# Altium PCB PCB1.PcbDoc
Units mil, origin at the board's own origin, x right, y up, seen from the top; angles counter-clockwise.
Board outline 1981.14 x 2390.95 mil, 2 copper layers (Top Layer, Bottom Layer), stack 61.756 mil thick; 46 components, 41 nets, 193 pads, 397 vias.
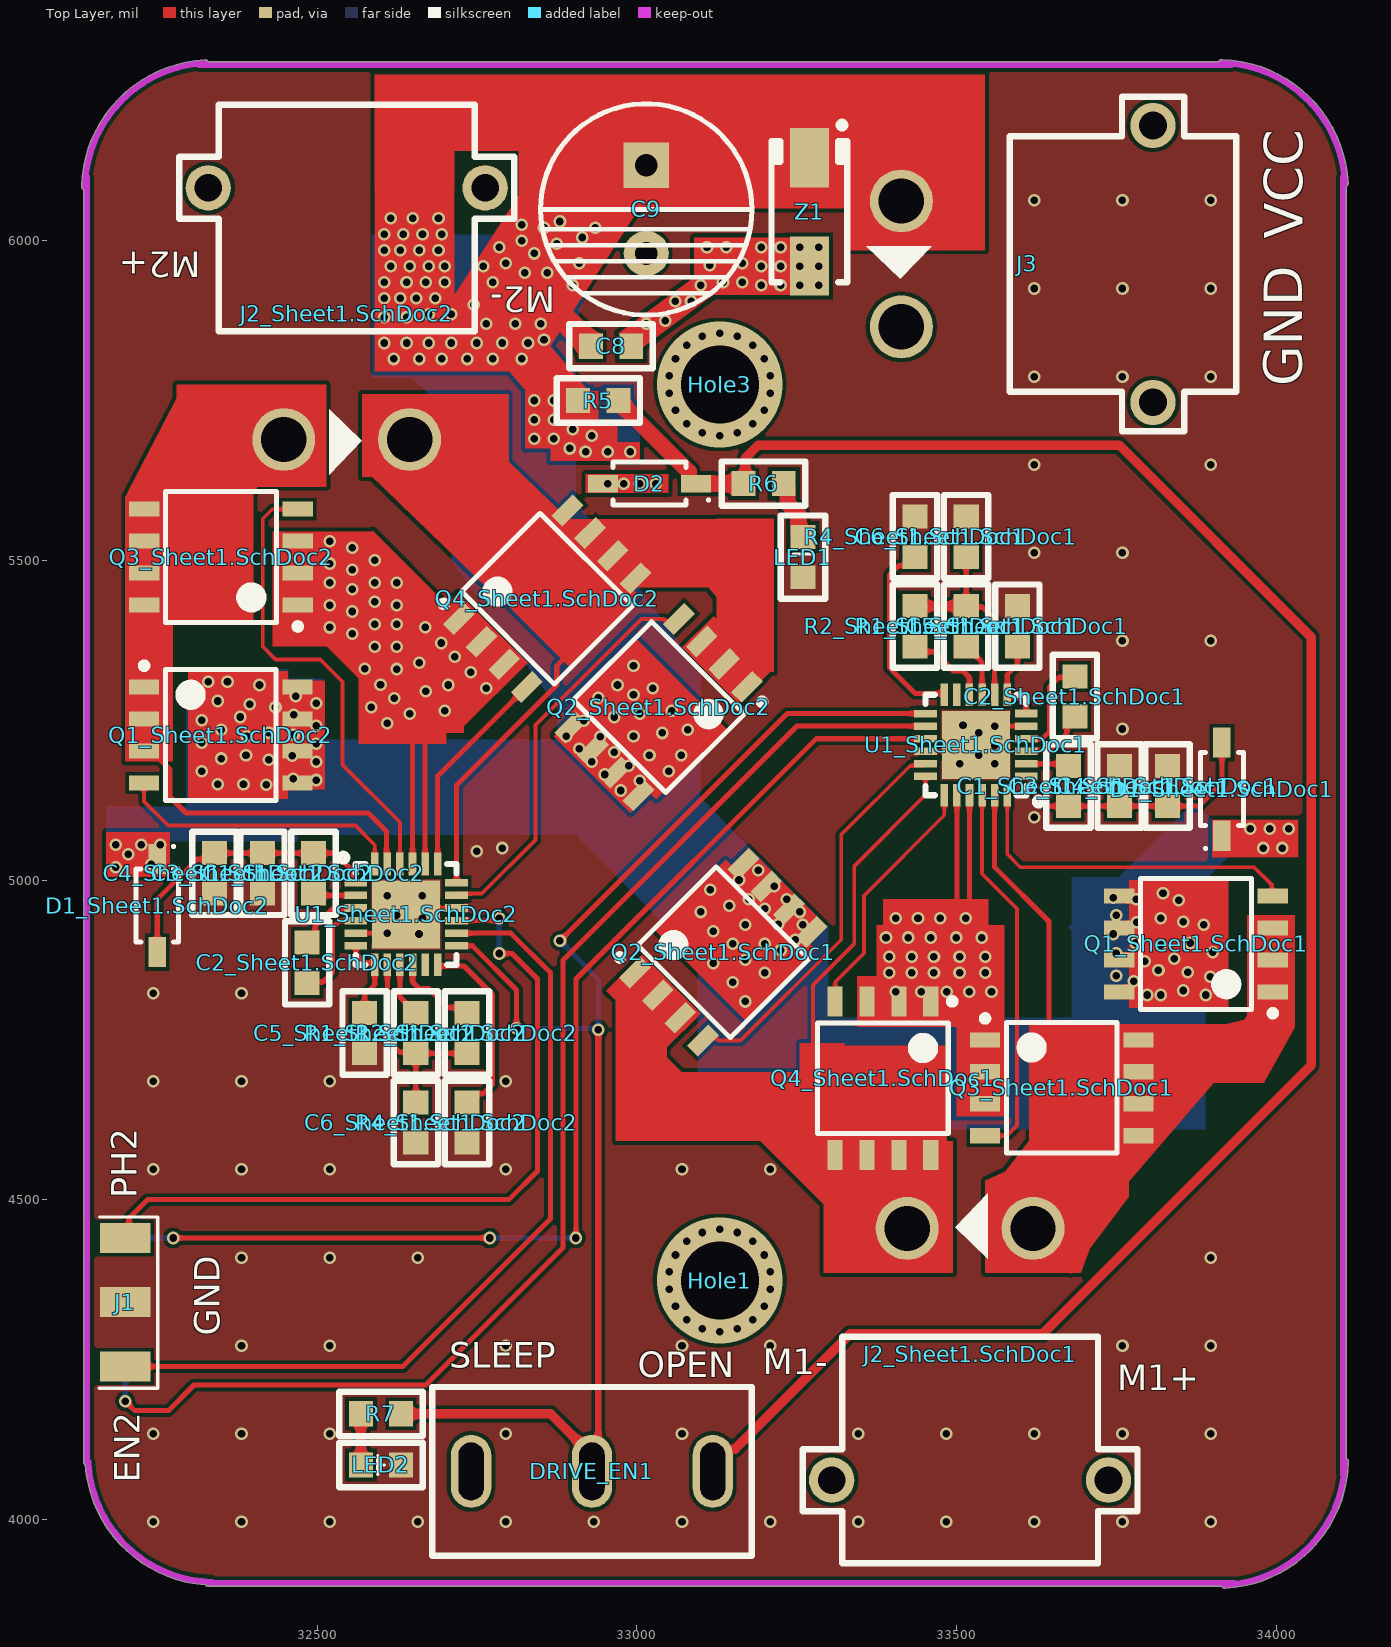
[diagram p0: Top Layer view]
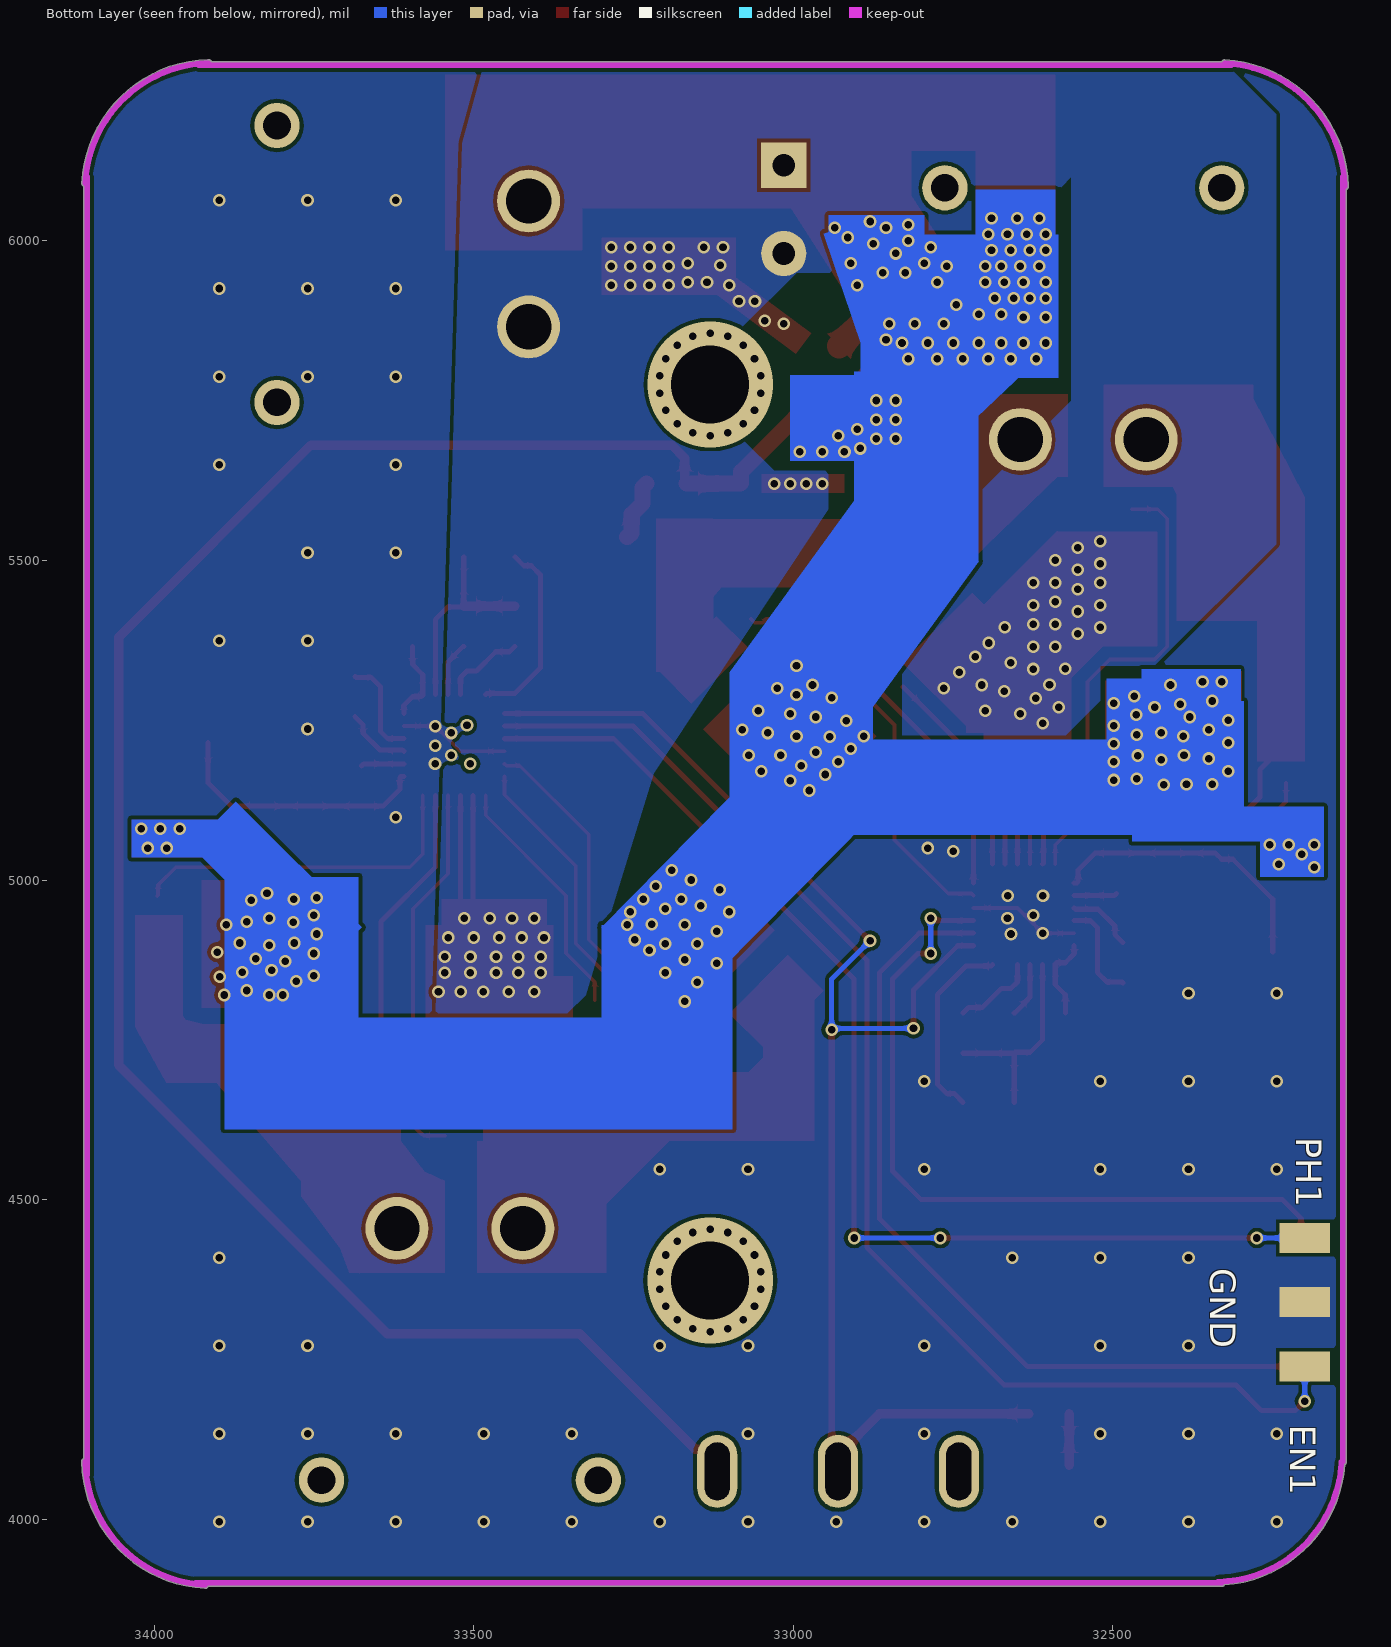
[diagram p1: Bottom Layer view, seen from below]
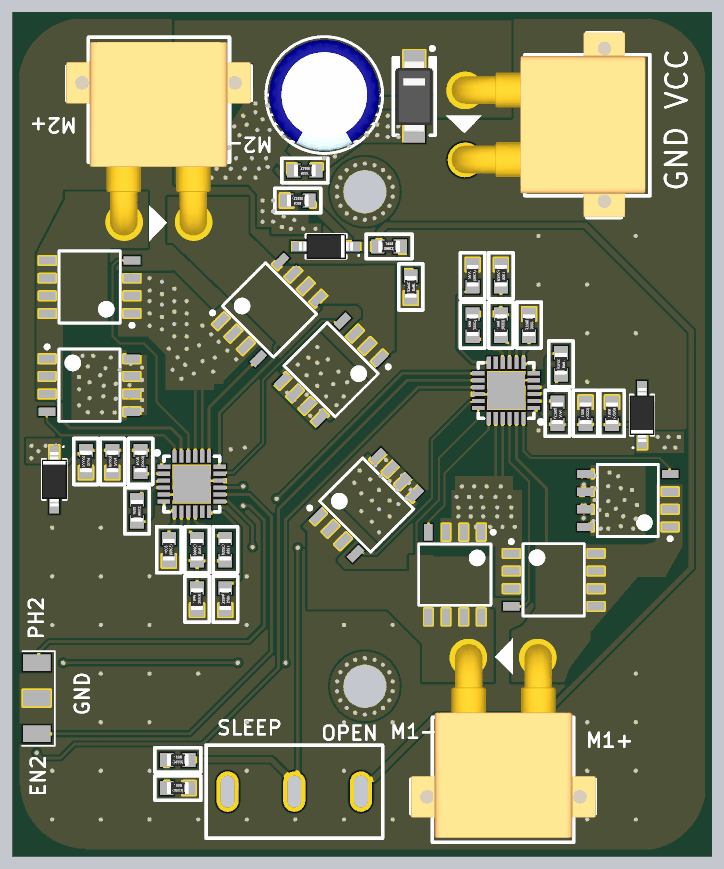
[diagram p2: 3D render of the assembled board from above, using the file's embedded part models]

## Layer stack, top to bottom
Top Solder: solder mask 1, SM-001, Dk 4
Top Layer: signal copper 1.378
Dielectric 1: core 59, Core-043, Dk 4.3
Bottom Layer: signal copper 1.378
Bottom Solder: solder mask 1, SM-001, Dk 4

## Board outline
32137.37,4085.73 ccw(c32340,4100) 32325.73,3897.37 ccw(c32330,3900) 32330,3894.99 33915.36,3894.99 ccw(c33919.89,3897.13) 33920.14,3892.12 ccw(c33910,4095) 34113.07,4089.92 ccw(c34108.05,4090.05) 34113.07,4090.05 ccw(c34108.05,4090.05) 34110.01,4094.66 34110.01,6085.36 ccw(c34107.87,6089.89) 34112.88,6089.89 ccw(c34107.87,6089.89) 34112.88,6090.14 ccw(c33910,6080) 33915.08,6283.07 ccw(c33914.95,6278.05) 33910.34,6280.02 32329.64,6280.02 ccw(c32325.11,6277.87) 32324.86,6282.88 ccw(c32335,6080) 32131.93,6085.08 ccw(c32136.95,6084.95) 32134.99,6080.34 32134.99,4090 ccw(c32140,4090)

## Design rules (kind name [scope] priority, off if disabled: settings)
Clearance [All] p1: gap=6 ignorepadtopadclearanceinfootprint=TRUE except(0: Arc-Hole Track-Hole SMDPad-Hole THPad-Hole Via-Hole Fill-Hole Poly-Hole Region-Hole Text-Hole)
DiffPairsRouting [All] p1: maxlimit=10 minlimit=6 mostfreqgap=10 toplayer_minwidth=6 toplayer_maxwidth=99 toplayer_prefwidth=15 bottomlayer_minwidth=6 bottomlayer_maxwidth=99 bottomlayer_prefwidth=15 maxuncoupledlength=500
HoleToHoleClearance [All] p1: gap=6 allowstackedmicrovias=TRUE
MinimumSolderMaskSliver [All] p1: minsoldermaskwidth=6
PlaneConnect [All] p1: planeconnectstyle=Direct reliefexpansion=20 reliefentries=4 reliefconductorwidth=10 reliefairgap=10
PolygonConnect [All] p1: connectstyle=Direct reliefconductorwidth=30 reliefentries=4 polygonreliefangle="90 Angle" airgapwidth=10
RoutingVias [All] p1: holewidth=11.81 width=19.68 viastyle="Through Hole" minholewidth=11.81 minwidth=19.68 maxholewidth=3897.64 maxwidth=3897.64
SilkToSilkClearance [All] p1: silktosilkclearance=0
SilkToSolderMaskClearance [IsPad] p1: minsilkscreentomaskgap=6 clearancetoexposedcopper=TRUE
SolderMaskExpansion [All] p1: expansion=4 istentingtop=FALSE
Width [All] p1: maxlimit=99 minlimit=6 preferedwidth=10
24 further rules are at their usual default settings.

## Classes and differential pairs
component class Sheet1.SchDoc2: C1_Sheet1.SchDoc2 C2_Sheet1.SchDoc2 C3_Sheet1.SchDoc2 C4_Sheet1.SchDoc2 C5_Sheet1.SchDoc2 C6_Sheet1.SchDoc2 D1_Sheet1.SchDoc2 J2_Sheet1.SchDoc2 Q1_Sheet1.SchDoc2 Q2_Sheet1.SchDoc2 Q3_Sheet1.SchDoc2 Q4_Sheet1.SchDoc2 R1_Sheet1.SchDoc2 R2_Sheet1.SchDoc2 R4_Sheet1.SchDoc2 U1_Sheet1.SchDoc2
component class Sheet1.SchDoc1: C1_Sheet1.SchDoc1 C2_Sheet1.SchDoc1 C3_Sheet1.SchDoc1 C4_Sheet1.SchDoc1 C5_Sheet1.SchDoc1 C6_Sheet1.SchDoc1 D1_Sheet1.SchDoc1 J2_Sheet1.SchDoc1 Q1_Sheet1.SchDoc1 Q2_Sheet1.SchDoc1 Q3_Sheet1.SchDoc1 Q4_Sheet1.SchDoc1 R1_Sheet1.SchDoc1 R2_Sheet1.SchDoc1 R4_Sheet1.SchDoc1 U1_Sheet1.SchDoc1
channel class Sheet1: Sheet11 Sheet12
component class Sheet2: C8 C9 D2 DRIVE_EN1 Hole1 Hole3 J1 J3 LED1 LED2 R5 R6 R7 Z1

## Components (designator, comment, footprint, x,y, rotation, side; value= is the part's Value field where it differs from the comment)
C1_Sheet1.SchDoc1 "1UF" 0603 33675.42,5147.01 r270 top (schematic designator C1)
C1_Sheet1.SchDoc2 "1UF" 0603 32494.5,5010.5 r90 top (schematic designator C1)
C2_Sheet1.SchDoc1 "0.1UF" 0603 33685.42,5287.01 r270 top (schematic designator C2)
C2_Sheet1.SchDoc2 "0.1UF" 0603 32484.5,4870.5 r90 top (schematic designator C2)
C3_Sheet1.SchDoc1 "10UF" 0603 33755.42,5147.01 r90 top (schematic designator C3)
C3_Sheet1.SchDoc2 "10UF" 0603 32414.5,5010.5 r270 top (schematic designator C3)
C4_Sheet1.SchDoc1 "0.1UF" 0603 33830.42,5147.01 r90 top (schematic designator C4)
C4_Sheet1.SchDoc2 "0.1UF" 0603 32339.5,5010.5 r270 top (schematic designator C4)
C5_Sheet1.SchDoc1 "1UF" 0603 33595.42,5397.01 r270 top (schematic designator C5)
C5_Sheet1.SchDoc2 "1UF" 0603 32574.5,4760.5 r90 top (schematic designator C5)
C6_Sheet1.SchDoc1 "1UF" 0603 33515.42,5537.01 r270 top (schematic designator C6)
C6_Sheet1.SchDoc2 "1UF" 0603 32654.5,4620.5 r90 top (schematic designator C6)
C8 "10UF" 0603 32960,5835 r180 top
C9 "220UF" DIP-EC3.5X8X11.5 33015,6117.8 r270 top
D1_Sheet1.SchDoc1 "1N5819" SOD-123 33915.42,5142.01 r90 top (schematic designator D1)
D1_Sheet1.SchDoc2 "1N5819" SOD-123 32250,4960 r270 top (schematic designator D1)
D2 "BZT52C3V3" SOD-123 33020,5620 r180 top
DRIVE_EN1 "SW-SPDT" ss12d10 32928.47,4072.95 r180 top
Hole1 "3mmVias" 3mm 33130,4373.43 r90 top
Hole3 "3mmVias" 3mm 33130,5775 r90 top
J1 "HDR2x3" pin_2*3 32203,4283 r90 top
J2_Sheet1.SchDoc1 "HDR1x2" TX30_接口 33528,4229 r180 top (schematic designator J2)
J2_Sheet1.SchDoc2 "HDR1x2" TX30_接口 32540,5915 r0 top (schematic designator J2)
J3 "HDR1x2" TX30_接口 33640,5970 r270 top
LED1 "LED0" 0603-led 33260,5505 r270 top
LED2 "LED0" 0603-led 32600,4085 r0 top
Q1_Sheet1.SchDoc1 "TPH1R403NL" TPH1R403NL#1 33874.92,4900 r180 top (schematic designator Q1)
Q1_Sheet1.SchDoc2 "TPH1R403NL" TPH1R403NL#2 32349.5,5226.69 r0 top (schematic designator Q1)
Q2_Sheet1.SchDoc1 "TPH1R403NL" TPH1R403NL#1 33135.42,4887.01 r45 top (schematic designator Q2)
Q2_Sheet1.SchDoc2 "TPH1R403NL" TPH1R403NL#3 33034.5,5270.5 r225 top (schematic designator Q2)
Q3_Sheet1.SchDoc1 "TPH1R403NL" TPH1R403NL#1 33665,4675 r0 top (schematic designator Q3)
Q3_Sheet1.SchDoc2 "TPH1R403NL" TPH1R403NL#3 32349.92,5505 r180 top (schematic designator Q3)
Q4_Sheet1.SchDoc1 "TPH1R403NL" TPH1R403NL#1 33385,4690 r270 top (schematic designator Q4)
Q4_Sheet1.SchDoc2 "TPH1R403NL" TPH1R403NL#3 32860,5440 r45 top (schematic designator Q4)
R1_Sheet1.SchDoc1 "10K" 0603 33515.42,5397.01 r90 top (schematic designator R1)
R1_Sheet1.SchDoc2 "10K" 0603 32654.5,4760.5 r270 top (schematic designator R1)
R2_Sheet1.SchDoc1 "10K" 0603 33435.42,5397.01 r90 top (schematic designator R2)
R2_Sheet1.SchDoc2 "10K" 0603 32734.5,4760.5 r270 top (schematic designator R2)
R4_Sheet1.SchDoc1 "200K" 0603 33435.42,5537.01 r90 top (schematic designator R4)
R4_Sheet1.SchDoc2 "200K" 0603 32734.5,4620.5 r270 top (schematic designator R4)
R5 "2.2K" 0603 32940,5750 r180 top
R6 "1K" 0603 33198.5,5620 r0 top
R7 "2K" 0603 32600,4165 r0 top
U1_Sheet1.SchDoc1 "Drv8701e" DRV8701E 33530.47,5212.23 r90 top (schematic designator U1)
U1_Sheet1.SchDoc2 "Drv8701e" DRV8701E 32639.44,4945.28 r270 top (schematic designator U1)
Z1 "Diode" SMA 33270,6045 r90 top

## Footprints (in the part's own frame and the unit in brackets; to place one, negate y for a bottom-side part, rotate by r counter-clockwise, add the part's x,y. Pads: shape width x height; smd on the part's side, far side on the other; paste and mask are expansions set on the pad)
3mm [mil]
0603 [mm] "SMD, 0603"
  rect 0.95x1 smd: 1(-0.8,0) 2(0.8,0)
  silkscreen extent -1.66,-0.88 1.66,0.88, body extent -0.77,-0.43 0.77,0.43, height 0.45
0603-led [mm] "SMD, 0603"
  rect 0.95x1 smd: 1(-0.8,0) 2(0.8,0)
  silkscreen extent -1.66,-0.88 1.66,0.88, body extent -0.77,-0.43 0.77,0.43, height 0.45
DIP-EC3.5X8X11.5 [mm]
  rect 1.8x1.8 hole 0.9: 1(0,0)
  round 1.8 hole 0.9: 2(3.5,0)
  silkscreen extent -2.45,-4.2 5.95,4.2, body extent -2.25,-4 5.75,4, height 11.53
DRV8701E [mm]
  rect 0.3x0.9 smd: 1(-1.277,-1.998) 2(-0.777,-1.998) 3(-0.277,-1.998) 4(0.224,-1.998) 5(0.724,-1.998) 6(1.224,-1.998) 13(1.223,2.002) 14(0.723,2.002) 15(0.223,2.002) 16(-0.277,2.002) 17(-0.776,2.002) 18(-1.276,2.002)
  rect 0.9x0.3 smd: 7(1.974,-1.248) 8(1.974,-0.748) 9(1.974,-0.247) 10(1.974,0.253) 11(1.974,0.753) 12(1.974,1.252) 19(-2.027,1.252) 20(-2.027,0.752) 21(-2.027,0.252) 22(-2.027,-0.247) 23(-2.027,-0.747) 24(-2.027,-1.247)
  rect 2.7x2.7 smd: 25(-0.025,0)
  silkscreen extent -2.43,-2.65 1.97,2
pin_2*3 [mil]
  rect 47.24x78.74 smd: 1(-44,3) 3(57,3) 5(157,3)
  rect 47.24x78.74 smd far side: 2(-44,3) 4(57,3) 6(157,3)
  silkscreen extent -78,-48 190,44
SMA [mm] "DO-214AC"
  rect 2.35x1.55 smd: 1(-2.15,0) 2(2.15,0)
  silkscreen extent -2.8,-1.5 3.58,1.5, body extent -2.6,-1.3 2.6,1.3, height 2.64
SOD-123 [mm]
  rect 1.2x0.7 smd: 1(-1.85,0) 2(1.85,0)
  silkscreen extent -2.4,-0.85 1.45,0.85, body extent -1.95,-0.9 1.95,0.9, height 1.18
ss12d10 [mm]
  oval 1.6x2.9 hole 1 slot 2.3 at 90 deg: 1(-4.839,-0.052) 2(-0.039,-0.052) 3(4.761,-0.052)
  silkscreen extent -6.39,-3.4 6.31,3.3
TPH1R403NL#1 [mm]
  rect 1.2x0.6 smd: D(3.05,1.905) D(3.05,-1.905) D(3.05,-0.635) D(3.05,0.635) G(-3.05,-1.905) S(-3.05,1.905) S(-3.05,-0.635) S(-3.05,0.635)
  Top Layer region: 2.667,2.54 -1.295,2.54 -1.295,-2.54 2.667,-2.54
  Top Layer lines w0.254: 2.896,2.083 2.616,2.083 ; 2.896,0.813 2.489,0.813 ; 2.896,0.457 2.489,0.457 ; 2.896,-2.083 2.591,-2.083 ; 2.87,-1.727 2.591,-1.727 ; 2.845,1.727 2.616,1.727 ; 2.845,-0.483 2.413,-0.483 ; 2.845,-0.813 2.54,-0.813 ; -2.845,0.813 -2.845,0.483
  silkscreen extent -3.18,-2.6 2.2,2.88, body extent -2.6,-2.6 2.6,2.6, height 1
TPH1R403NL#2 [mm]
  rect 1.2x0.6 smd: D(3.05,-1.905) D(3.05,1.905) D(3.05,-0.635) D(3.05,0.635) G(-3.05,-1.905) S(-3.05,1.905) S(-3.05,-0.635) S(-3.05,0.635)
  Top Layer region: 2.667,2.54 -1.295,2.54 -1.295,-2.54 2.667,-2.54
  Top Layer lines w0.254: 2.413,-0.483 2.845,-0.483 ; 2.489,0.457 2.896,0.457 ; 2.489,0.813 2.896,0.813 ; 2.54,-0.813 2.845,-0.813 ; 2.591,-2.083 2.896,-2.083 ; 2.591,-1.727 2.87,-1.727 ; 2.616,1.727 2.845,1.727 ; 2.616,2.083 2.896,2.083
  silkscreen extent -3.17,-2.6 2.2,2.88, body extent -2.6,-2.6 2.6,2.6, height 1
TPH1R403NL#3 [mm]
  rect 1.2x0.6 smd: D(3.05,1.905) D(3.05,-1.905) D(3.05,0.635) D(3.05,-0.635) G(-3.05,-1.905) S(-3.05,1.905) S(-3.05,-0.635) S(-3.05,0.635)
  Top Layer region: 2.667,2.54 -1.295,2.54 -1.295,-2.54 2.667,-2.54
  Top Layer lines w0.254: 2.896,-2.083 2.591,-2.083 ; 2.87,-1.727 2.591,-1.727 ; 2.845,-0.813 2.54,-0.813 ; 2.845,-0.483 2.413,-0.483 ; 2.896,0.457 2.489,0.457 ; 2.896,0.813 2.489,0.813 ; 2.845,1.727 2.616,1.727 ; 2.896,2.083 2.616,2.083 ; -2.845,0.483 -2.845,0.635 -2.845,0.813
  silkscreen extent -3.17,-2.6 2.2,2.88, body extent -2.6,-2.6 2.6,2.6, height 1
TX30_接口 [mm]
  round 2.5 hole 1.8: 1(2.663,-5.74) 2(-2.337,-5.74)
  round 1.8 hole 1.1: SH(-5.337,4.26) SH(5.663,4.26)
  silkscreen extent -6.49,-7.13 6.81,7.57, body extent -6.52,-6.72 6.78,7.23, height 5

## Part data
C1_Sheet1.SchDoc1 C1_Sheet1.SchDoc2 C2_Sheet1.SchDoc1 C2_Sheet1.SchDoc2 C3_Sheet1.SchDoc1 C3_Sheet1.SchDoc2 C4_Sheet1.SchDoc1 C4_Sheet1.SchDoc2 C5_Sheet1.SchDoc1 C5_Sheet1.SchDoc2 C6_Sheet1.SchDoc1 C6_Sheet1.SchDoc2 C8: library part CAP, "Capacitor"
C9: library part CAP-TANTALUM, "Tantalum Capacitor"
D1_Sheet1.SchDoc1 D1_Sheet1.SchDoc2: library part 1N4148, "高速开关二极管", BOM名称=高速开关二极管, 学习资源=www.ooocke.com, 版权归属=源创客
D2: library part "Diode 18TQ045", "Schottky Rectifier", ComponentLink1Description="Manufacturer Link", ComponentLink1URL=http://www.irf.com/, ComponentLink2Description=Datasheet, ComponentLink2URL=http://www.irf.com/product-info/datasheets/data/18tq.pdf, DatasheetVersion=Dec-1997, LatestRevisionDate=17-Jul-2002, LatestRevisionNote="Re-released for DXP Platform.", Note="Terminal 2 is the TAB and is electrically connected to the cathode", PackageDescription="TO, Thru-Hole, Vertical, Heatsink Mounted; 3 In-Line Leads (1 Absent); Pitch 2.54 mm", PackageReference=TO-220AC, PackageVersion=Feb-1998, Published=8-Jun-2000, Publisher="Altium Limited"
DRIVE_EN1: "SPDT Subminiature Toggle Switch, Right Angle Mounting, Vertical Actuation", ComponentLink1Description="Manufacturer Link", ComponentLink1URL=http://www.apem.com, DatasheetVersion=05-Dec-2000, LatestRevisionDate=17-Dec-2003, LatestRevisionNote="Schematic revised, PCB Footprint replaced.", PackageDescription="Switch; 4 Leads", PackageReference=TL36WW15050, Published=24-Mar-1999, Publisher="Altium Limited"
J1 J2_Sheet1.SchDoc1 J2_Sheet1.SchDoc2 J3: "Connector"
LED1 LED2: "Typical INFRARED GaAs LED", LatestRevisionDate=08-Jul-2005, LatestRevisionNote="Mech Layer 1 removed.", PackageDescription="LED; 2 Leads", PackageReference=LED-0, Published=8-Jun-2000, Publisher="Altium Limited"
R1_Sheet1.SchDoc1 R1_Sheet1.SchDoc2 R2_Sheet1.SchDoc1 R2_Sheet1.SchDoc2 R4_Sheet1.SchDoc1 R4_Sheet1.SchDoc2 R5 R6 R7: library part RES, "Resistor"
Z1: "Zener Diode"

## Via types
v1: diameter 19.68, hole 11.81, Top Layer to Bottom Layer, tented both sides, 395 vias
v2: diameter 196.85, hole 122.05, Top Layer to Bottom Layer, tented both sides, 2 vias

## Nets (pads, with @x,y where several pads share a name; then routed paths per layer and width w, separated by ;. In a path a pad name is that pad's centre, name@x,y a point inside that pad or via, vN(x,y) a via of type N, cw(c..) or ccw(c..) an arc to the next point about the centre after c; other vN are vias at no path point)
3.3: D2.1 DRIVE_EN1.1 R5.1 R6.1 | length 3195.4
  Top Layer w15: DRIVE_EN1.1 33118.98,4087.6 33141.15,4109.77 33153.75,4109.77 33333.98,4290 33635,4290 34055,4710 34055,5380 33755,5680 33190,5680 33170,5660 33170,5622.99 R6.1
  Top Layer w25: R5.1 32971.5,5749.02 33081.71,5638.8 33081.71,5621.28 33082.99,5620 D2.1 R6.1
EN1: J1.2 U1_Sheet1.SchDoc1.14 | length 2019
  Top Layer w8: v1(32200,4185) 32215,4170 32267.5,4170 32307.5,4210 32670,4210 32885,4425 32885,4875 33250.68,5240.68 U1_Sheet1.SchDoc1.14
  Bottom Layer w8: v1(32200,4185) J1.2
EN2: J1.1 U1_Sheet1.SchDoc2.14 | length 1318.1
  Top Layer w8: J1.1 32634,4239 32865,4470 32865,4855 32803.17,4916.83 U1_Sheet1.SchDoc2.14
GND: C3_Sheet1.SchDoc1.2 C3_Sheet1.SchDoc2.2 C4_Sheet1.SchDoc1.2 C4_Sheet1.SchDoc2.2 C5_Sheet1.SchDoc1.1 C5_Sheet1.SchDoc2.1 C6_Sheet1.SchDoc1.1 C6_Sheet1.SchDoc2.1 J1.3 J1.4 LED1.2 LED2.2 R4_Sheet1.SchDoc1.2 R4_Sheet1.SchDoc2.2 U1_Sheet1.SchDoc1.5 U1_Sheet1.SchDoc1.16 U1_Sheet1.SchDoc1.25 U1_Sheet1.SchDoc2.5 U1_Sheet1.SchDoc2.16 U1_Sheet1.SchDoc2.25 | length 347.6
  Top Layer w6: U1_Sheet1.SchDoc2.5 v1(32609.94,4916.78) U1_Sheet1.SchDoc2.25 32649.34,4956.18 U1_Sheet1.SchDoc2.16 ; U1_Sheet1.SchDoc1.16 33520.57,5201.33 v1(33559.97,5240.73) U1_Sheet1.SchDoc1.5
  other v1: 32244.1,3996.06 32381.9,3996.06 32519.69,3996.06 32657.49,3996.06 32795.28,3996.06 32933.08,3996.06 33070.87,3996.06 33208.67,3996.06 33346.46,3996.06 33484.26,3996.06 33622.05,3996.06 33759.85,3996.06 33897.64,3996.06 32244.1,4133.86 32381.9,4133.86 32519.69,4133.86 32795.28,4133.86 33070.87,4133.86 33346.46,4133.86 33484.26,4133.86 33622.05,4133.86 33759.85,4133.86 33897.64,4133.86 32381.9,4271.65 32519.69,4271.65 32795.28,4271.65 33070.87,4271.65 33208.67,4271.65 33759.85,4271.65 33897.64,4271.65 32381.9,4409.45 32519.69,4409.45 32657.49,4409.45 33897.64,4409.45 32244.1,4547.24 32381.9,4547.24 32519.69,4547.24 32795.28,4547.24 33070.87,4547.24 33208.67,4547.24 32244.1,4685.04 32381.9,4685.04 32519.69,4685.04 32795.28,4685.04 32244.1,4822.84 32381.9,4822.84 32659.5,4915.5 32665,4940 32625,4945 32609.5,4975.5 32664.5,4975.5 32750,5045 32790,5050 33622.05,5098.43 33505.42,5182.01 33560.42,5182.01 33535,5195 33560,5210 33535,5230 33759.85,5236.22 33510.42,5242.01 33759.85,5374.02 33897.64,5374.02 33622.05,5511.81 33759.85,5511.81 33622.05,5649.61 33897.64,5649.61 33622.05,5787.4 33759.85,5787.4 33897.64,5787.4 33622.05,5925.2 33759.85,5925.2 33897.64,5925.2 33622.05,6062.99 33759.85,6062.99 33897.64,6062.99
M+_Sheet1.SchDoc1: J2_Sheet1.SchDoc1.2 Q1_Sheet1.SchDoc1.S Q3_Sheet1.SchDoc1.D U1_Sheet1.SchDoc1.23 | length 427.7
  Top Layer w6: 33645,4772.03 33662.03,4755 33670,4755
  Top Layer w8: U1_Sheet1.SchDoc1.23 33559.89,5020.11 33645,4935 33645,4772.03
M+_Sheet1.SchDoc2: J2_Sheet1.SchDoc2.2 Q1_Sheet1.SchDoc2.S Q3_Sheet1.SchDoc2.D U1_Sheet1.SchDoc2.23 | length 521.1
  Top Layer w8: Q1_Sheet1.SchDoc2.S@32229.42,5201.69 32241.23,5201.69 32249.04,5193.87 32270,5172.92 32270,5130 32295,5105 32580,5105 32608.59,5076.42 32608.59,5026.52 U1_Sheet1.SchDoc2.23
  Top Layer w10: 32237.42,5285.69 Q1_Sheet1.SchDoc2.S@32237.42,5298.69
M-_Sheet1.SchDoc1: J2_Sheet1.SchDoc1.1 Q2_Sheet1.SchDoc1.S Q4_Sheet1.SchDoc1.D U1_Sheet1.SchDoc1.18 | length 588.8
  Top Layer w6: 33260,4655 33262.4,4655 33276,4668.6 33276,4836 33340.42,4900.42 33340.42,5022.01 33451.67,5133.27 U1_Sheet1.SchDoc1.18
  Top Layer w25: Q2_Sheet1.SchDoc1.S@33068.19,4783.45 Q2_Sheet1.SchDoc1.S@33068.19,4784.43
M-_Sheet1.SchDoc2: J2_Sheet1.SchDoc2.1 Q2_Sheet1.SchDoc2.S Q4_Sheet1.SchDoc2.D U1_Sheet1.SchDoc2.18 | length 426.6
  Top Layer w8: U1_Sheet1.SchDoc2.18 32718.24,5148.24 32875,5305 32875,5335 32890,5350
  Top Layer w25: Q2_Sheet1.SchDoc2.S@33101.73,5373.09 Q2_Sheet1.SchDoc2.S@33101.73,5374.06
NetC1_Sheet1.SchDoc1_1: C1_Sheet1.SchDoc1.1 U1_Sheet1.SchDoc1.2 | length 67.6
  Top Layer w8: U1_Sheet1.SchDoc1.2 33672.29,5181.64 C1_Sheet1.SchDoc1.1
NetC1_Sheet1.SchDoc1_2: C1_Sheet1.SchDoc1.2 C3_Sheet1.SchDoc1.1 C4_Sheet1.SchDoc1.1 D1_Sheet1.SchDoc1.2 U1_Sheet1.SchDoc1.1 | length 414.1
  Top Layer w8: U1_Sheet1.SchDoc1.1 33613.51,5161.97 33615.42,5160.07 33615.42,5142.01 33641.92,5115.52 C1_Sheet1.SchDoc1.2 C3_Sheet1.SchDoc1.1 C4_Sheet1.SchDoc1.1 33878.92,5115.52 33915.42,5152.01 D1_Sheet1.SchDoc1.2
NetC1_Sheet1.SchDoc2_1: C1_Sheet1.SchDoc2.1 U1_Sheet1.SchDoc2.2 | length 67.6
  Top Layer w8: C1_Sheet1.SchDoc2.1 32497.63,4975.87 U1_Sheet1.SchDoc2.2
NetC1_Sheet1.SchDoc2_2: C1_Sheet1.SchDoc2.2 C3_Sheet1.SchDoc2.1 C4_Sheet1.SchDoc2.1 D1_Sheet1.SchDoc2.2 U1_Sheet1.SchDoc2.1 | length 453.3
  Top Layer w8: D1_Sheet1.SchDoc2.2 32250,4970 32312.5,5032.5 32330,5032.5 C4_Sheet1.SchDoc2.1 C3_Sheet1.SchDoc2.1 C1_Sheet1.SchDoc2.2 32528,5042 32554.5,5015.5 32554.5,4997.45 32556.4,4995.54 U1_Sheet1.SchDoc2.1
NetC2_Sheet1.SchDoc1_1: C2_Sheet1.SchDoc1.1 U1_Sheet1.SchDoc1.4 | length 157.6
  Top Layer w8: U1_Sheet1.SchDoc1.4 33634.45,5221.04 33645.42,5232.01 33645.42,5302.01 33660.42,5317.01 33683.92,5317.01 C2_Sheet1.SchDoc1.1
NetC2_Sheet1.SchDoc1_2: C2_Sheet1.SchDoc1.2 U1_Sheet1.SchDoc1.3 | length 106.6
  Top Layer w8: U1_Sheet1.SchDoc1.3 33611.06,5203.23 33646.64,5203.23 33672.91,5229.5 33672.91,5243.01 C2_Sheet1.SchDoc1.2
NetC2_Sheet1.SchDoc2_1: C2_Sheet1.SchDoc2.1 U1_Sheet1.SchDoc2.4 | length 157.6
  Top Layer w8: C2_Sheet1.SchDoc2.1 32485.99,4840.5 32509.5,4840.5 32524.5,4855.5 32524.5,4925.5 32535.47,4936.47 U1_Sheet1.SchDoc2.4
NetC2_Sheet1.SchDoc2_2: C2_Sheet1.SchDoc2.2 U1_Sheet1.SchDoc2.3 | length 106.6
  Top Layer w8: C2_Sheet1.SchDoc2.2 32497.01,4914.51 32497.01,4928.01 32523.28,4954.29 32558.86,4954.29 U1_Sheet1.SchDoc2.3
NetC5_Sheet1.SchDoc1_2: C5_Sheet1.SchDoc1.2 U1_Sheet1.SchDoc1.6 U1_Sheet1.SchDoc1.7 | length 132
  Top Layer w8: C5_Sheet1.SchDoc1.2 33595.42,5337.01 33579.61,5321.21 U1_Sheet1.SchDoc1.7 33579.61,5288.92 33581.52,5287.01 33595.42,5287.01 33609.15,5273.28 U1_Sheet1.SchDoc1.6
NetC5_Sheet1.SchDoc2_2: C5_Sheet1.SchDoc2.2 U1_Sheet1.SchDoc2.6 U1_Sheet1.SchDoc2.7 | length 132
  Top Layer w8: U1_Sheet1.SchDoc2.6 32560.76,4884.24 32574.5,4870.5 32588.4,4870.5 32590.3,4868.6 U1_Sheet1.SchDoc2.7 32590.3,4836.31 32574.5,4820.5 C5_Sheet1.SchDoc2.2
NetC6_Sheet1.SchDoc1_2: C6_Sheet1.SchDoc1.2 R1_Sheet1.SchDoc1.2 R2_Sheet1.SchDoc1.2 U1_Sheet1.SchDoc1.8 | length 327.8
  Top Layer w8: C6_Sheet1.SchDoc1.2 R1_Sheet1.SchDoc1.2 33516.92,5427.01 33540.42,5427.01 33559.92,5407.51 U1_Sheet1.SchDoc1.8
  Top Layer w15: R2_Sheet1.SchDoc1.2 R1_Sheet1.SchDoc1.2
NetC6_Sheet1.SchDoc2_2: C6_Sheet1.SchDoc2.2 R1_Sheet1.SchDoc2.2 R2_Sheet1.SchDoc2.2 U1_Sheet1.SchDoc2.8 | length 327.8
  Top Layer w8: U1_Sheet1.SchDoc2.8 32609.99,4750.01 32629.5,4730.5 32653,4730.5 R1_Sheet1.SchDoc2.2 ; C6_Sheet1.SchDoc2.2 R1_Sheet1.SchDoc2.2 ; R2_Sheet1.SchDoc2.2 R1_Sheet1.SchDoc2.2
NetLED1_1: LED1.1 R6.2 | length 96.5
  Top Layer w25: R6.2 33236.2,5613.8 33236.2,5588.8 33252.81,5572.19 33252.81,5542.7 33259.02,5536.5 LED1.1
NetLED2_1: LED2.1 R7.1 | length 80
  Top Layer w15: LED2.1 R7.1
NetQ1_Sheet1.SchDoc1_G: Q1_Sheet1.SchDoc1.G U1_Sheet1.SchDoc1.24 | length 543.8
  Top Layer w6: U1_Sheet1.SchDoc1.24 33579.58,5040.42 33600,5020 33965.84,5020 33993.55,4992.3 33993.55,4976.45 Q1_Sheet1.SchDoc1.G
NetQ1_Sheet1.SchDoc2_G: Q1_Sheet1.SchDoc2.G U1_Sheet1.SchDoc2.24 | length 447.5
  Top Layer w6: Q1_Sheet1.SchDoc2.G 32229.42,5122.93 32267.35,5085 32560,5085 32590.33,5054.67 U1_Sheet1.SchDoc2.24
NetQ2_Sheet1.SchDoc1_G: Q2_Sheet1.SchDoc1.G U1_Sheet1.SchDoc1.17 | length 620.1
  Top Layer w6: Q2_Sheet1.SchDoc1.G@33109.54,4755.07 33122.01,4755.07 33128.01,4749.07 33162.48,4749.07 33320,4906.59 33320,5070.93 33427.85,5178.79 33448.77,5178.79 U1_Sheet1.SchDoc1.17
NetQ2_Sheet1.SchDoc2_G: Q2_Sheet1.SchDoc2.G U1_Sheet1.SchDoc2.17 | length 637.7
  Top Layer w6: U1_Sheet1.SchDoc2.17 32721.15,4978.73 32757.72,4978.73 32841.5,5062.5 32841.5,5242.5 33007.44,5408.44 33041.91,5408.44 33047.91,5402.44 33060.37,5402.44 Q2_Sheet1.SchDoc2.G
NetQ3_Sheet1.SchDoc1_G: Q3_Sheet1.SchDoc1.G U1_Sheet1.SchDoc1.22 | length 595.8
  Top Layer w6: U1_Sheet1.SchDoc1.22 33540.18,5009.82 33595,4955 33595,4616 33581.5,4602.5 33580.51,4602.5 33578.01,4600 Q3_Sheet1.SchDoc1.G
NetQ3_Sheet1.SchDoc2_G: Q3_Sheet1.SchDoc2.G U1_Sheet1.SchDoc2.22 | length 731.1
  Top Layer w6: Q3_Sheet1.SchDoc2.G 32430,5580 32415,5565 32415,5365 32435,5345 32505,5345 32540,5310 32540,5180 32629.73,5090.27 U1_Sheet1.SchDoc2.22
NetQ4_Sheet1.SchDoc1_G: Q4_Sheet1.SchDoc1.G U1_Sheet1.SchDoc1.19 | length 390.6
  Top Layer w6: Q4_Sheet1.SchDoc1.G@33310.54,4812.51 33310.54,4840.54 33355.42,4885.42 33355.42,4975.42 33481.19,5101.19 U1_Sheet1.SchDoc1.19
NetQ4_Sheet1.SchDoc2_G: Q4_Sheet1.SchDoc2.G U1_Sheet1.SchDoc2.19 | length 334.7
  Top Layer w8: U1_Sheet1.SchDoc2.19 32688.72,5162.66 Q4_Sheet1.SchDoc2.G
NetR1_Sheet1.SchDoc1_1: R1_Sheet1.SchDoc1.1 U1_Sheet1.SchDoc1.9 | length 86.4
  Top Layer w8: R1_Sheet1.SchDoc1.1 33516.4,5365.52 33531.11,5350.82 33531.11,5349.83 33540.21,5340.72 U1_Sheet1.SchDoc1.9
NetR1_Sheet1.SchDoc2_1: R1_Sheet1.SchDoc2.1 U1_Sheet1.SchDoc2.9 | length 86.4
  Top Layer w8: U1_Sheet1.SchDoc2.9 32629.7,4816.79 32638.81,4807.68 32638.81,4806.7 32653.51,4792 R1_Sheet1.SchDoc2.1
NetR2_Sheet1.SchDoc1_1: R2_Sheet1.SchDoc1.1 U1_Sheet1.SchDoc1.10 | length 132.2
  Top Layer w8: R2_Sheet1.SchDoc1.1 33443.92,5357.01 33465.42,5357.01 33495.42,5327.01 33510.42,5327.01 33520.52,5316.91 U1_Sheet1.SchDoc1.10
NetR2_Sheet1.SchDoc2_1: R2_Sheet1.SchDoc2.1 U1_Sheet1.SchDoc2.10 | length 132.2
  Top Layer w8: U1_Sheet1.SchDoc2.10 32649.39,4840.61 32659.5,4830.5 32674.5,4830.5 32704.5,4800.5 32725.99,4800.5 R2_Sheet1.SchDoc2.1
NetR4_Sheet1.SchDoc1_1: R4_Sheet1.SchDoc1.1 U1_Sheet1.SchDoc1.12 | length 300.1
  Top Layer w8: R4_Sheet1.SchDoc1.1 33421.49,5491.59 33409.99,5491.59 33395.42,5477.01 33395.42,5332.01 33435.42,5292.01 33479.27,5292.01 33481.17,5290.11 U1_Sheet1.SchDoc1.12
NetR4_Sheet1.SchDoc2_1: R4_Sheet1.SchDoc2.1 U1_Sheet1.SchDoc2.12 | length 297.5
  Top Layer w8: U1_Sheet1.SchDoc2.12 32688.74,4867.41 32690.65,4865.5 32730.06,4865.5 32774.5,4821.07 32774.5,4680.5 32759.92,4665.93 32748.43,4665.93 R4_Sheet1.SchDoc2.1
nSLEEP: DRIVE_EN1.2 R7.2 U1_Sheet1.SchDoc1.13 U1_Sheet1.SchDoc2.13 | length 2239.9
  Top Layer w8: U1_Sheet1.SchDoc2.13 32742.88,4897.12 32811.99,4828.01 v1(32811.99,4768.01) ; v1(32880,4905) 33235.39,5260.39 U1_Sheet1.SchDoc1.13 ; DRIVE_EN1.2@32930,4100.59 DRIVE_EN1.2 DRIVE_EN1.2@32940,4085
  Top Layer w10: DRIVE_EN1.2@32940,4085 v1(32940,4766.03)
  Top Layer w15: R7.2 32865.59,4165 DRIVE_EN1.2@32930,4100.59
  Bottom Layer w8: v1(32811.99,4768.01) 32938.01,4768.01 v1(32940,4766.03) 32940,4845 v1(32880,4905)
PG: C8.1 C9.2 D2.2 J3.1 Q3_Sheet1.SchDoc1.S Q3_Sheet1.SchDoc2.S Q4_Sheet1.SchDoc1.S Q4_Sheet1.SchDoc2.S U1_Sheet1.SchDoc1.20 U1_Sheet1.SchDoc1.21 U1_Sheet1.SchDoc2.20 U1_Sheet1.SchDoc2.21 Z1.1 | length 995.4
  Top Layer w8: U1_Sheet1.SchDoc2.21 32649.37,5234.37 32650,5235 ; U1_Sheet1.SchDoc2.20 32669.03,5234.03 32670,5235 ; Q4_Sheet1.SchDoc2.S@32713.71,5399.77 Q4_Sheet1.SchDoc2.S@32722.06,5408.12 ; v1(33500,4910) 33500.88,4910.88 U1_Sheet1.SchDoc1.20 ; U1_Sheet1.SchDoc1.21 33520.54,4909.46 33525,4905 ; Q3_Sheet1.SchDoc1.S@33537.11,4642.19 Q3_Sheet1.SchDoc1.S@33544.92,4650
  Top Layer w25: Q3_Sheet1.SchDoc1.S@33544.92,4650 33544.92,4700 Q3_Sheet1.SchDoc1.S@33544.92,4750
  other v1: 33405,4825 33445,4825 33485,4825 33520,4825 33555,4825 33395,4855 33430,4855 33465,4855 33505,4855 33545,4855 33395,4880 33430,4880 33465,4880 33505,4880 33545,4880 33390,4910 33425,4910 33460,4910 33540,4910 33405,4940 33440,4940 33475,4940 33515,4940 32610,5245 32645.25,5259.75 32700,5265 32585,5270 32620.5,5284.5 32670,5295 32765,5300 32705,5305 32599.29,5305.71 32740.25,5324.75 32574.54,5330.46 32625,5330 32660,5340 32715.5,5349.5 32590,5365 32625,5365 32694.29,5370.71 32555,5385 32520,5395 32669.54,5395.46 32590,5400 32625,5400 32555,5420 32520,5430 32625,5430 32590,5435 32555,5455 32520,5465 32590,5465 32625,5465 32555,5485 32520,5495 32590,5500 32555,5520 32520,5530 32955,5620 32980,5620 33005,5620 33030,5620 33015,5870 33045,5875 33060,5905 33085,5905 33100,5930 33195,5930 33225,5930 33255,5930 33285,5930 33135,5935 33165,5935 33195,5960 33225,5960 33255,5960 33285,5960 33114.22,5961.3 33165,5965 33110,5990 33140,5990 33195,5990 33225,5990 33255,5990 33285,5990
PH1: J1.6 U1_Sheet1.SchDoc1.15 | length 1812.4
  Top Layer w8: v1(32275,4440) v1(32770,4440) ; v1(32905,4440) 32905,4845 33280.99,5220.99 U1_Sheet1.SchDoc1.15
  Bottom Layer w8: J1.6 v1(32275,4440) ; v1(32770,4440) v1(32905,4440)
PH2: J1.5 U1_Sheet1.SchDoc2.15 | length 1202.9
  Top Layer w8: J1.5 32205.94,4445.94 32205.94,4470.94 32235,4500 32800,4500 32845,4545 32845,4845 32805,4885 v1(32785,4885) ; U1_Sheet1.SchDoc2.15 32781.52,4936.52 v1(32785,4940)
  Bottom Layer w8: v1(32785,4885) v1(32785,4940)
VCC: C8.2 C9.1 D1_Sheet1.SchDoc1.1 D1_Sheet1.SchDoc2.1 J3.2 Q1_Sheet1.SchDoc1.D Q1_Sheet1.SchDoc2.D Q2_Sheet1.SchDoc1.D Q2_Sheet1.SchDoc2.D R5.2 Z1.2 | length 550.8
  Top Layer w38: 32860,5900 32863.89,5900 32928.5,5835.39 C8.2 ; R5.2@32907.01,5751.88 32908.5,5750.39 R5.2
  Top Layer w40: C9.1@33012.2,6115 C9.1
  Top Layer w50: C9.1 33264.49,6117.8 33270,6123.31 Z1.2 33346.35,6129.65 J3.2 J3.2@33423.24,6052.76
  other v1: 33170,4810 33798.48,4820.11 33819.69,4820.11 33890.4,4820.11 33855.04,4827.18 33150,4840 33777.26,4841.33 33897.47,4848.4 33750,4850 33200,4855 33862.11,4855.47 33816.15,4859 33120,4870 33794.94,4873.15 33170,4875 33840.9,4876.68 33750,4885 33901.01,4887.29 33225,4890 33819.69,4897.89 33150,4900 33200,4900 33780.8,4901.43 33865.65,4901.43 33247.9,4906.19 33745.44,4915.57 33120,4920 33170,4930 33260,4930 33886.86,4929.71 33221.74,4930.94 33782.44,4933.81 33855,4935 33819.69,4940.32 33750,4945 33100,4950 33255,4950 33200,4955 33145,4960 33847.97,4968.6 33175,4970 33235,4970 33781.44,4969.81 33745.44,4972.14 33823.22,4979.21 33115,4985 33215,4990 33160,5000 33190,5015 32185,5020 32240.5,5024.5 32205,5040 33980,5050 34010,5050 32185,5055 32225,5055 32255,5055 33960,5080 33990,5080 34020,5080 32975,5140 32420.71,5149.29 32345,5150 32385,5150 33005,5155 32498.49,5156.36 32462.5,5158.69 32950,5165 32320,5170 33050,5170 32987.83,5178.58 32498.49,5184.64 32930,5185 32424.25,5188.18 32350,5190 32388.89,5195.25 32461.5,5194.69 33020,5195 33070,5195 32965,5200 32910,5205 32498.49,5212.93 32320,5215 32943.26,5224.06 32390,5225 32890,5225 32995,5225 32463.14,5227.07 33040,5230 32424.25,5230.61 32350,5235 33080,5235 32498.49,5241.21 32917.1,5248.81 32320,5250 32380,5255 32965,5255 32463.5,5258.69 33005,5260 33055,5265 32435,5270 32395,5275 32498.49,5276.57 32345,5280 32940,5285 32466.67,5287.18 32995,5290 33025,5300 32410,5305 32970,5305 32330,5310 32360,5310 32995,5335 32920,5670 32955,5670 32990,5670 32895,5675 32840,5690 32870,5690 32930,5695 32900,5705 32840,5720 32870,5720 32840,5750 32870,5750 32620,5815 32660,5815 32695,5815 32735,5815 32775,5815 32820,5815 32605,5840 32640,5840 32675,5840 32710,5840 32750,5840 32790,5840 32830,5840 32855,5845 32765,5870 32810,5870 32850,5870 32605,5880 32640,5880 32675,5885 32710,5885 32745,5900 32605,5910 32630,5910 32655,5910 32685,5910 32900,5930 32605,5935 32640,5935 32670,5935 32700,5935 32775,5935 32825,5950 32860,5950 32615,5960 32645,5960 32675,5960 32700,5960 32760,5960 32795,5965 32910,5965 32840,5980 32605,5985 32630,5985 32660,5985 32690,5985 32785,5990 32875,5995 32820,6000 32915,6005 32605,6010 32635,6010 32665,6010 32695,6010 32855,6020 32935,6020 32820,6025 32880,6030 32615,6035 32650,6035 32690,6035
pads on no net: DRIVE_EN1.3 J2_Sheet1.SchDoc1.SH J2_Sheet1.SchDoc2.SH J3.SH U1_Sheet1.SchDoc1.11 U1_Sheet1.SchDoc2.11
copper on no net:
  other v1: 33130,4293.43 33102.64,4298.25 33157.36,4298.25 33078.58,4312.14 33181.42,4312.14 33060.72,4333.43 33199.28,4333.43 33051.22,4359.53 33208.78,4359.53 33051.22,4387.32 33208.78,4387.32 33060.72,4413.43 33199.28,4413.43 33078.58,4434.71 33181.42,4434.71 33102.64,4448.6 33157.36,4448.6 33130,4453.43 33130,5695 33102.64,5699.82 33157.36,5699.82 33078.58,5713.72 33181.42,5713.72 33060.72,5735 33199.28,5735 33051.22,5761.11 33208.78,5761.11 33051.22,5788.89 33208.78,5788.89 33060.72,5815 33199.28,5815 33078.58,5836.28 33181.42,5836.28 33102.64,5850.18 33157.36,5850.18 33130,5855
  other v2: 33130,4373.43 33130,5775

## Polygon pours and split planes (outlines as drawn)
PG on Bottom Layer "PG_L02_P007" (solid, remove dead copper, pour order 7): 32595,5205 32520,5280 32520,5335 32435,5335 32245,5525 32245,6198.14 32376.86,6330 33470,6330 33517.5,6152.5 33560,4770 33375,4770 33325,4820 33218.32,5166.68 32945,5580 32945,5635 32950,5640 33030,5640 33110,5720 33110,5835 32995,5950 32715,5950 32565,6100 32565,5750 32830,5485 32830,5213.1
GND on Bottom Layer "GND_L02_P017" (solid, remove dead copper, pour order 17): 31840,6570 34440,6570 34700,6310 34335,5945 34335,3730 31865,3730 31800,3795
GND on Top Layer "GND_L01_P016" (solid, remove dead copper, pour order 16): 31885,6575 32010,6450 34640,6450 34640,3890 34280,3530 34055,3755 31710,3755

## Keep-outs
Keep-Out Layer:
  lines w10: 32136.95,6084.95 cw(c32335,6080) 32325.11,6277.87 ; 32140,4090 32140,6100 ; 32142.13,4090.11 ccw(c32340,4100) 32335.05,3901.95 ; 32315,6275 33930,6275 ; 32330,3900 33935,3900 ; 33914.95,6278.05 cw(c33910,6080) 34107.87,6089.89 ; 33919.89,3897.13 ccw(c33910,4095) 34108.05,4090.05 ; 34105,4070 34105,6100

## Other copper
Top Layer:
  rectangle net VCC: 33330,5985 33545,6220
  rectangle net VCC: 32890,6050 33055,6220
  rectangle net VCC: 32815,6050 33545,6260
  rectangle net VCC: 32610,6140 32895,6260
  rectangle net PG: 33090,5915 33300,6005
  region net PG: 32995.72,5822.37 33138.67,5928.3 33114.22,5961.3 32971.27,5855.36
  region net M+_Sheet1.SchDoc1: 33695,4385 33752.53,4538.42 33717.42,4551.59 33659.88,4398.17
  region net M+_Sheet1.SchDoc1: 33639.34,4396.13 33695,4385 33740,4610 33684.34,4621.13
  region net M+_Sheet1.SchDoc1: 33647.08,4407.77 33679.08,4383.77 33770,4505 33738,4529
  rectangle net M+_Sheet1.SchDoc1: 33645,4505 33770,4600
  region net M+_Sheet1.SchDoc1: 33758.81,4514.59 33907.05,4687.53 33823.53,4759.12 33675.29,4586.18
  region net M-_Sheet1.SchDoc1: 33292.16,4671.6 33027.16,4671.6 33027.16,4591.6 33292.16,4591.6
  region net M-_Sheet1.SchDoc1: 33186.09,4598.67 33307.38,4477.38 33356.88,4526.88 33235.59,4648.17
  rectangle net M-_Sheet1.SchDoc1: 33292.16,4385 33495,4591.6
  rectangle net M-_Sheet1.SchDoc1: 33255,4635 33325,4745
  rectangle net M-_Sheet1.SchDoc1: 33045,4630 33305,4700
  region net VCC: 33295.21,4929.79 33175,5050 33080.15,4955.15 33200.36,4834.94
  rectangle net M+_Sheet1.SchDoc1: 33730,4682.66 33981.3,4775.03
  region net M+_Sheet1.SchDoc1: 33981.3,4682.66 34030,4770 33964.52,4806.51 33915.82,4719.17
  region net M+_Sheet1.SchDoc1: 33545,4530 33585.13,4442.76 33766.3,4526.08 33726.17,4613.33
  rectangle net M+_Sheet1.SchDoc1: 33545,4385 33695,4530
  region net M+_Sheet1.SchDoc1: 33562.3,4526.41 33629.4,4474.22 33700,4565 33632.91,4617.18
  rectangle net PG: 33345,4770 33570,4850
  rectangle net VCC: 32590,5795 32715,6260
  region net M+_Sheet1.SchDoc1: 33916.49,4752.87 33965,4765 33960.15,4784.4 33911.64,4772.28
  rectangle net M+_Sheet1.SchDoc1: 33955,4770 34030,4945
  rectangle net VCC: 33900,5035 34035,5095
  rectangle net PG: 32565,5230 32730,5280
  region net PG: 32654.32,5289.32 32541.82,5401.82 32510,5370 32622.5,5257.5
  rectangle net PG: 32565,5212.5 32702.5,5380
  region net M-_Sheet1.SchDoc2: 33120.61,5413.39 33071.11,5363.89 33159.5,5275.5 33209,5325
  region net VCC: 32869.79,5225.21 32990,5105 33084.85,5199.85 32964.64,5320.06
  region net M-_Sheet1.SchDoc2: 33102.46,5467.96 33135,5430 33161.57,5452.78 33129.03,5490.74
  rectangle net PG: 32920,5605 33050,5635
  rectangle net M-_Sheet1.SchDoc2: 32595,5655 32760,5675
  rectangle net M-_Sheet1.SchDoc2: 32615,5640 32760,5665
  region net M-_Sheet1.SchDoc2: 33214.5,5325 33214.5,5565.5 33125,5565.5 33125,5325
  region net M+_Sheet1.SchDoc2: 32383.7,5612.11 32401.58,5603.17 32415,5630 32397.11,5638.94
  region net VCC: 32512.63,5141.92 32512.63,5311.92 32378.49,5311.92 32378.49,5141.92
  region net PG: 32586.92,5546.92 32495,5455 32702.5,5247.5 32794.42,5339.42
  rectangle net PG: 32430,5365 32590,5545
  region net PG: 32727.5,5237.5 32830,5340 32720.4,5449.6 32617.9,5347.1
  rectangle net M-_Sheet1.SchDoc2: 32891.11,5457.72 33190,5565
  rectangle net PG: 33375,4795 33575,4930
  rectangle net PG: 33500,4630 33575,4850
  rectangle net VCC: 32950,5655 33005,5685
  rectangle net VCC: 32825,5675 32940,5765
  rectangle net VCC: 32865,5655 32970,5710
  region net M-_Sheet1.SchDoc2: 32696.99,5753.93 32581.74,5634.35 32792.09,5431.6 32907.34,5551.18
  rectangle net M+_Sheet1.SchDoc2: 32200,5185 32275,5600
  rectangle net M+_Sheet1.SchDoc2: 32280,5565 32400,5775
  region net M+_Sheet1.SchDoc2: 32200,5600 32266.54,5565.39 32348.35,5722.65 32281.81,5757.27
  rectangle net M-_Sheet1.SchDoc2: 32745,5620 32800,5760
  rectangle net M+_Sheet1.SchDoc2: 32295,5615 32515,5775
  region net VCC: 32697.22,5886.79 32839.64,5795.23 33012.01,6063.35 32869.58,6154.91
  rectangle net M-_Sheet1.SchDoc2: 32570,5630 32630,5710
  rectangle net M-_Sheet1.SchDoc2: 32570,5695 32760,5760
  rectangle net M-_Sheet1.SchDoc2: 32590,5665 32760,5705
  rectangle net VCC: 32697.22,5795.23 32839.64,5890
  region net VCC: 32881.86,5700.16 32938.76,5748.94 32844.18,5859.29 32787.27,5810.51
  rectangle net PG: 33385,4910 33550,4970
  rectangle net PG: 33345,4770 33480,4850
  region net PG: 33405,4820 33440.36,4855.36 33419.14,4876.57 33383.79,4841.21
  region net M-_Sheet1.SchDoc1: 33047.16,4591.6 33047.16,4821.6 32967.16,4821.6 32967.16,4591.6
  region net M-_Sheet1.SchDoc1: 33004.29,4702.07 33075.68,4630.68 33107.5,4662.5 33036.11,4733.89
  region net M-_Sheet1.SchDoc1: 32951.88,4826.88 33044.26,4734.5 33100.83,4791.06 33008.45,4883.45
  rectangle net VCC: 32170,5005 32270,5075
Bottom Layer:
  rectangle net VCC: 32170,5005 32270,5115
  region net VCC: 32926.97,5199.16 33100,5325 32882.05,5624.68 32709.03,5498.84
  rectangle net VCC: 32170,5060 32470,5115
  rectangle net VCC: 32295,5070 33100,5220
  rectangle net VCC: 32875,5135 33100,5325
  rectangle net VCC: 32890,5655 33005,5790
  region net VCC: 33172.74,4798.84 33301.02,4925.11 33008.38,5222.45 32880.09,5096.19
  region net VCC: 33745,4855 33942.5,5052.5 33871.79,5123.21 33674.29,4925.71
  rectangle net VCC: 33900,5035 34035,5095
  rectangle net VCC: 32795,6005 32945,6040
  region net VCC: 32835.38,5851.61 32892.25,5832.46 32952.54,6011.46 32895.68,6030.61
  rectangle net VCC: 32590,5980 32715,6080
  rectangle net VCC: 33680,4630 33890,5005
  region net VCC: 33215,4860 33285,4930 33150,5065 33080,4995
  rectangle net VCC: 33095,4630 33300,4930
  rectangle net VCC: 33095,4610 33890,4785
  rectangle net VCC: 32585,5785 32895,6010
  rectangle net VCC: 32295,5070 32475,5280
  rectangle net VCC: 32445,5200 32510,5315
  rectangle net VCC: 32300,5180 32455,5330
  rectangle net VCC: 32710,5500 32905,5795
  region net VCC: 32669.5,5860.72 32621.52,5809.74 32714.13,5722.59 32762.1,5773.56

## Silkscreen, mask and mechanical layers (free items; w line width, h text height)
Top Overlay:
  text "VCC" at 34042,6003 h60 r90
  text "M2+" at 32318,5983 h40 r180
  text "M2-" at 32873,5928 h40 r180
  text "GND" at 34041.2,5771.93 h60 r90
  text "PH2" at 32218,4502 h40 r90
  text "GND" at 32348,4287 h40 r90
  text "SLEEP" at 32707,4237 h40
  text "M1-" at 33197,4227 h40
  text "OPEN" at 33002,4222 h40
  text "M1+" at 33752,4202 h40
  text "EN2" at 32223,4057 h40 r90
Bottom Overlay:
  text "PH1" at 32213,4598 h40 r90
  text "GND" at 32348,4393 h40 r90
  text "EN1" at 32223,4148 h40 r90
Bottom Solder:
  text "南京邮电大学" at 34060,5554.51 h160
  text "塔塔开队" at 34044.85,5378.48 h160
  text "2022.4.27" at 34040.15,5196.78 h160

## Text inside footprints (layer, text, board x,y; h text height)
J2_Sheet1.SchDoc1: Mechanical 15 "+" at 33638.45,4395.05 h80 r180; Mechanical 15 "-" at 33436.56,4396.67 h98.43 r180
J2_Sheet1.SchDoc2: Mechanical 15 "+" at 32429.55,5748.95 h80; Mechanical 15 "-" at 32631.44,5747.33 h98.43
J3: Mechanical 15 "+" at 33473.95,6080.45 h80 r270; Mechanical 15 "-" at 33472.33,5878.56 h98.43 r270